# Altium PCB Doggy.PcbDoc
Units mil, origin at the board's own origin, x right, y up, seen from the top; angles counter-clockwise.
Board outline 1960.63 x 1960.63 mil, 2 copper layers (Top Layer, Bottom Layer); 53 components, 42 nets, 177 pads, 41 vias.
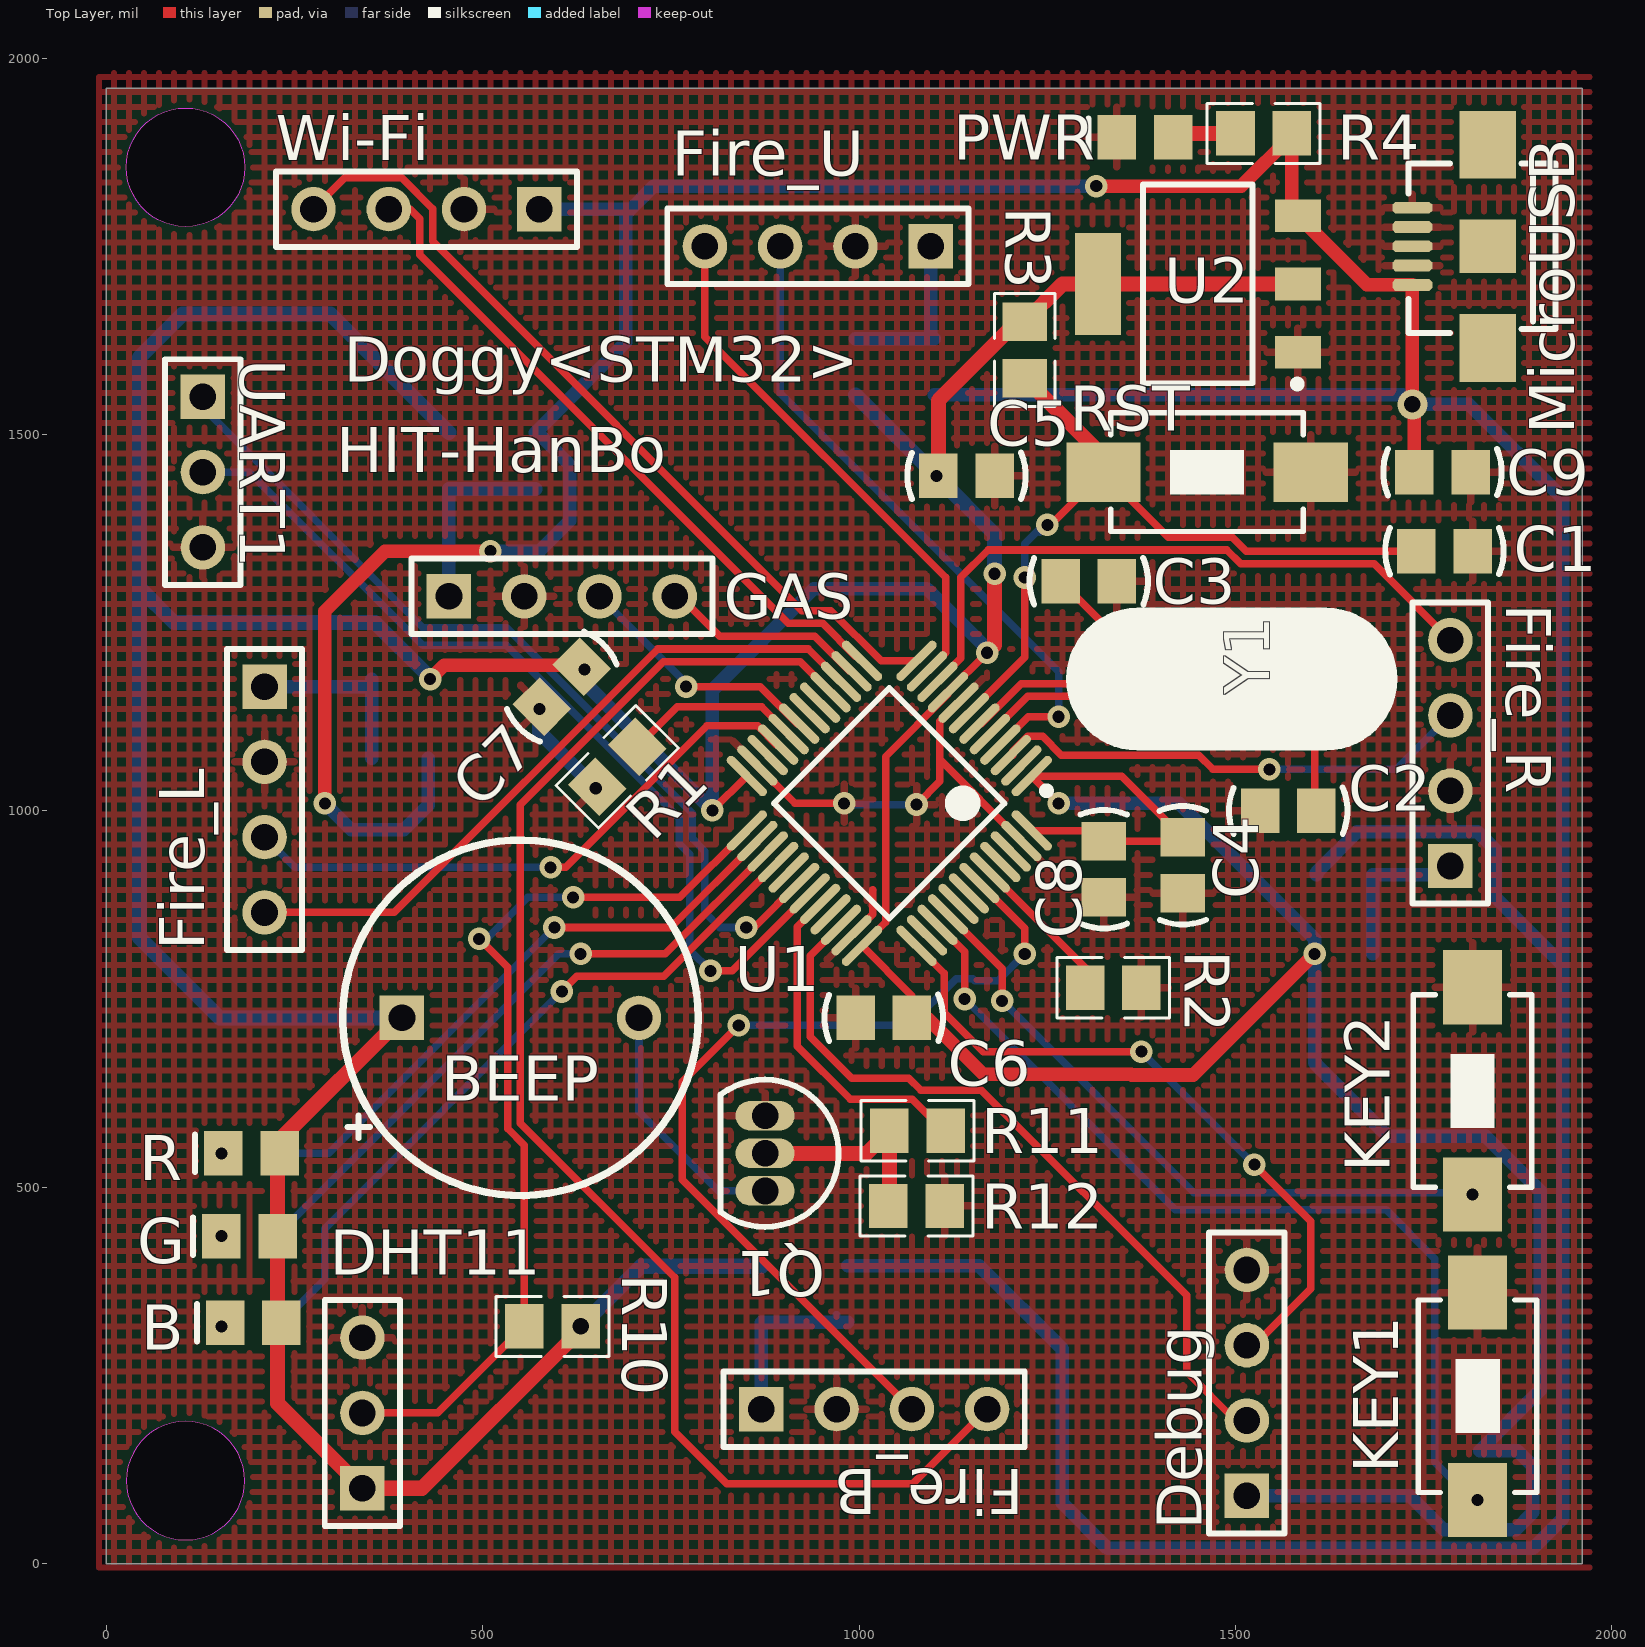
[diagram p0: Top Layer view]
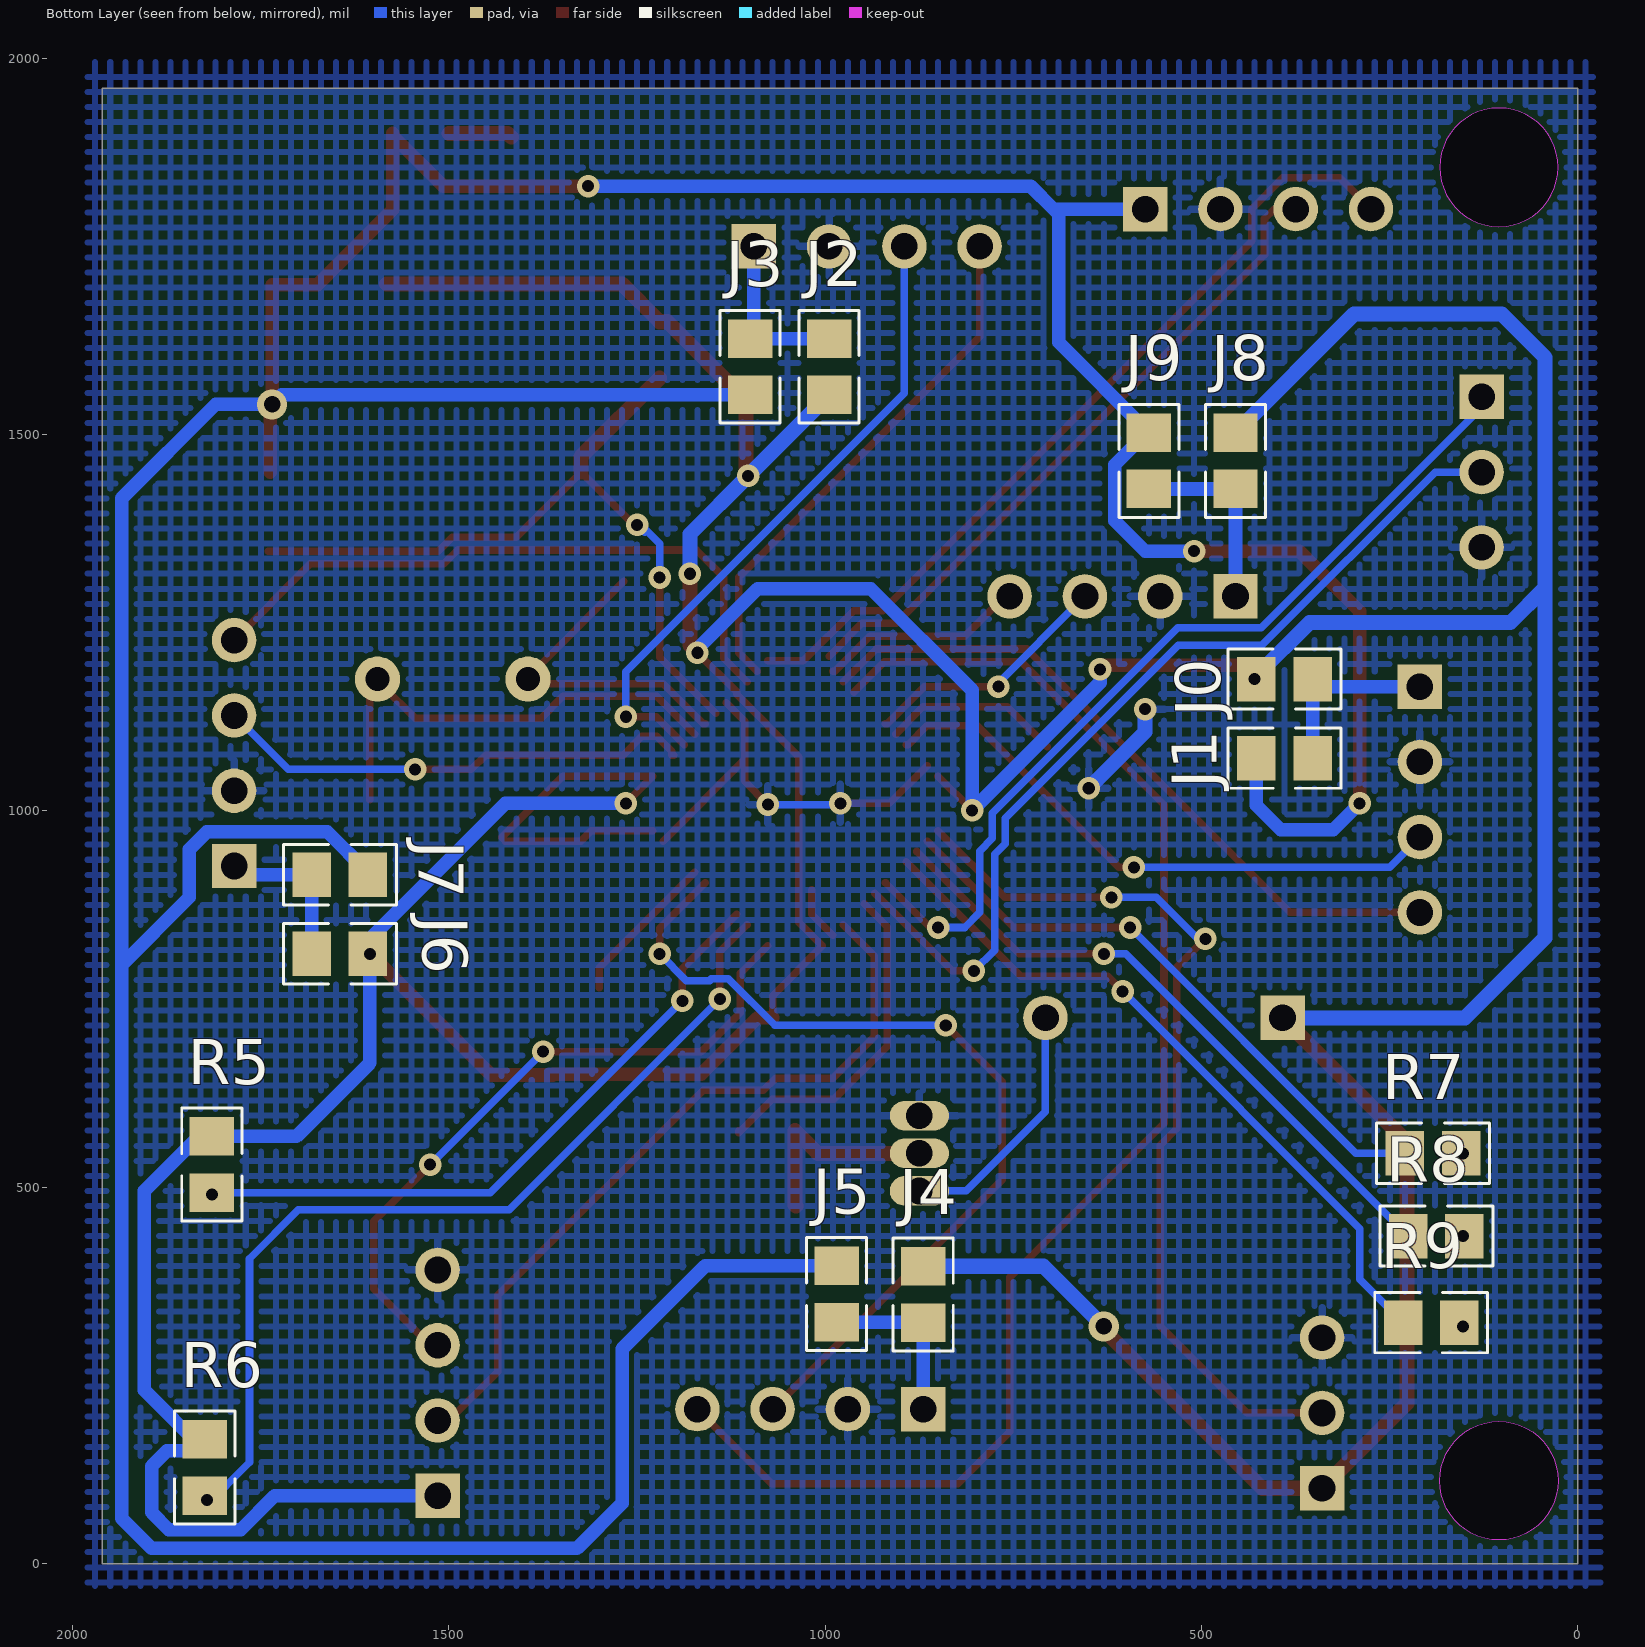
[diagram p1: Bottom Layer view, seen from below]

## Layer stack, top to bottom
Top Solder: solder mask 0.4, Solder Resist, Dk 3.5
Top Layer: signal copper 1.4
Dielectric 1: dielectric 12.6, FR-4, Dk 4.8
Bottom Layer: signal copper 1.4
Bottom Solder: solder mask 0.4, Solder Resist, Dk 3.5

## Board outline
0,-0.63 1960.63,-0.63 1960.63,1960 0,1960
cut-out: 105,1776.26 cw(c105,1855) 26.26,1855 cw(c105,1855) 105,1933.74 cw(c105,1855) 183.74,1855 cw(c105,1855)
cut-out: 26.26,110 ccw(c105,110) 105,31.26 ccw(c105,110) 183.74,110 ccw(c105,110) 105,188.74 ccw(c105,110)

## Design rules (kind name [scope] priority, off if disabled: settings)
Clearance [All] p1: gap=7
PolygonConnect [All] p1: connectstyle=Relief reliefconductorwidth=10 reliefentries=4 polygonreliefangle="90 Angle" airgapwidth=10
RoutingVias [All] p1: holewidth=16 width=30 viastyle="Through Hole" minholewidth=16 minwidth=30 maxholewidth=28 maxwidth=50
SolderMaskExpansion [All] p1: expansion=4
Width [All] p1: maxlimit=50 minlimit=7 preferedwidth=15
30 further rules are at their usual default settings.

## Components (designator, comment, footprint, x,y, rotation, side; value= is the part's Value field where it differs from the comment)
B "LED0" LED_0805 195,320 r180 top
BEEP "BEEP" Beep 550,725 r0 top
C1 "Cap" C-RAD-0805 1777.6,1345 r180 top
C2 "Cap" C-RAD-0805 1570,1000 r0 top
C3 "Cap" C-RAD-0805 1305,1305 r180 top
C4 "Cap" C-RAD-0805 1430,927.6 r90 top
C5 "Cap" C-RAD-0805 1142.6,1445 r180 top
C6 "Cap" C-RAD-0805 1032.6,725 r0 top
C7 "Cap" C-RAD-0805 605,1165 r45 top
C8 "Cap" C-RAD-0805 1325,922.49 r90 top
C9 "Cap" C-RAD-0805 1775,1450 r180 top
Debug "Header 4" HDR1X4 1515,90 r90 top
DHT11 "Header 3" HDR1X3 340,100 r90 top
Fire_B "Header 4" HDR1X4 870,205 r0 top
Fire_L "Header 4" HDR1X4 210,1165 r270 top
Fire_R "Header 4" HDR1X4 1785.36,926.7 r90 top
Fire_U "Header 4" HDR1X4 1095,1750 r180 top
G "LED0" LED_0805 190,435 r180 top
GAS "Header 4" HDR1X4 455,1285 r0 top
J0 "Res1" 0805-1 390,1175 r0 bottom
J1 "Res1" 0805-1 390,1070 r0 bottom
J2 "Res1" 0805-1 995,1590 r270 bottom
J3 "Res1" 0805-1 1100,1590 r270 bottom
J4 "Res1" 0805-1 870,357.56 r90 bottom
J5 "Res1" 0805-1 985,357.91 r90 bottom
J6 "Res1" 0805-1 1645,810 r180 bottom
J7 "Res1" 0805-1 1645,915 r180 bottom
J8 "Res1" 0805-1 455,1465 r90 bottom
J9 "Res1" 0805-1 570,1465 r90 bottom
KEY1 "SW-PB" SW_PB2_A1 1821.52,220 r0 top
KEY2 "SW-PB" SW_PB2_A1 1815,630 r180 top
MicroUSB "USB_M" USB_MICRO 1835,1750 r90 top
PWR "LED0" LED_0805 1379.8,1895 r180 top
Q1 "S8050" TO-92A 875,545 r180 top
R "LED0" LED_0805 192.6,545 r180 top
R1 "Res1" 0805-1 678.55,1058.55 r225 top
R2 "Res1" 0805-1 1337.6,765 r0 top
R3 "Res1" 0805-1 1220,1612.4 r90 top
R4 "Res1" 0805-1 1537.4,1900 r180 top
R5 "Res1" 0805-1 1815,530 r270 bottom
R6 "Res1" 0805-1 1824.42,127.6 r270 bottom
R7 "Res1" 0805-1 192.6,545 r180 bottom
R8 "Res1" 0805-1 188.19,435 r180 bottom
R9 "Res1" 0805-1 195,320 r180 bottom
R10 "Res1" 0805-1 592.6,315 r0 top
R11 "Res1" 0805-1 1077.4,575 r180 top
R12 "Res1" 0805-1 1076.19,475 r180 top
RST "SW-PB" SW_PB2_A1 1460,1450 r270 top
U1 "STM32F103C8T6" STM-LQFP48_N 1040,1010 r225 top
U2 "AMS1117-3.3" SOT-223 1450,1700 r90 top
UART1 "Header 3" HDR1X3 127.97,1550 r270 top
Wi-Fi "Header 4" HDR1X4 575,1799.32 r180 top
Y1 "XTAL" X-HC49U 1495,1175 r0 top

## Footprints (in the part's own frame and the unit in brackets; to place one, negate y for a bottom-side part, rotate by r counter-clockwise, add the part's x,y. Pads: shape width x height; smd on the part's side, far side on the other; paste and mask are expansions set on the pad)
0805-1 [mm] "贴片带丝印"
  rect 1.3x1.5 smd: 1(-0.95,0) 2(0.95,0)
  silkscreen extent -1.91,-1.02 1.91,1.02, body extent -1.14,-0.51 1.14,0.51, height 1
Beep [mm] "蜂鸣器"
  rect 1.5x1.5 hole 0.9: 1(-4,0)
  round 1.5 hole 0.9: 2(4,0)
  silkscreen extent -6,-6 6,6
C-RAD-0805 [mm] "贴片电容"
  rect 1.3x1.5 smd: 1(-0.95,0) 2(0.95,0)
  silkscreen extent -2,-0.79 2,0.79, body extent -1.27,-0.64 1.27,0.64, height 0.9
HDR1X3 [mm] "Connector; Header; 3 Position"
  rect 1.5x1.5 hole 0.9: 1(0,0)
  round 1.5 hole 0.9: 2(2.54,0) 3(5.08,0)
  silkscreen extent -1.27,-1.27 6.35,1.27
HDR1X4 [mm] "Connector; Header; 4 Position"
  rect 1.5x1.5 hole 0.9: 1(0,0)
  round 1.5 hole 0.9: 2(2.54,0) 3(5.08,0) 4(7.62,0)
  silkscreen extent -1.27,-1.27 8.89,1.27
LED_0805 [mm] "贴片二极管"
  rect 1.3x1.5 smd: 1(-0.95,0) 2(0.95,0)
  silkscreen extent 1.91,-0.63 1.91,0.64
SOT-223 [mm]
  rect 1.1x1.55 smd: 1(-2.3,-3.375) 2(0,-3.375) 3(2.3,-3.375)
  rect 3.45x1.55 smd: 4(0,3.375)
  silkscreen extent -3.5,-3.48 3.35,1.85, body extent -3.3,-3.94 3.3,3.43, height 0.8
STM-LQFP48_N [mm] "QFP, 48-Leads, Body 7x7mm, Pitch 0.5mm, IPC Medium Density"
  oval 1.8x0.3 smd: 1(-4.05,2.75) 2(-4.05,2.25) 3(-4.05,1.75) 4(-4.05,1.25) 5(-4.05,0.75) 6(-4.05,0.25) 7(-4.05,-0.25) 8(-4.05,-0.75) 9(-4.05,-1.25) 10(-4.05,-1.75) 11(-4.05,-2.25) 12(-4.05,-2.75) 25(4.05,-2.75) 26(4.05,-2.25) 27(4.05,-1.75) 28(4.05,-1.25) 29(4.05,-0.75) 30(4.05,-0.25) 31(4.05,0.25) 32(4.05,0.75) 33(4.05,1.25) 34(4.05,1.75) 35(4.05,2.25) 36(4.05,2.75)
  oval 0.3x1.8 smd: 13(-2.75,-4.05) 14(-2.25,-4.05) 15(-1.75,-4.05) 16(-1.25,-4.05) 17(-0.75,-4.05) 18(-0.25,-4.05) 19(0.25,-4.05) 20(0.75,-4.05) 21(1.25,-4.05) 22(1.75,-4.05) 23(2.25,-4.05) 24(2.75,-4.05) 37(2.75,4.05) 38(2.25,4.05) 39(1.75,4.05) 40(1.25,4.05) 41(0.75,4.05) 42(0.25,4.05) 43(-0.25,4.05) 44(-0.75,4.05) 45(-1.25,4.05) 46(-1.75,4.05) 47(-2.25,4.05) 48(-2.75,4.05)
  silkscreen extent -4.17,-2.75 2.75,3.57, body extent -3.5,-3.5 3.5,3.5, height 1.6
SW_PB2_A1 [mm]
  rect 2x2.5 smd: 1(0,3.556) 2(0,-3.444)
  silkscreen extent -2,-3.19 2,3.31, body extent -2.03,-3.17 2.03,3.3, height 1.2
TO-92A [mm]
  oval 2x1 hole 0.9: 1(0,-1.27) 2(0,0) 3(0,1.27)
  silkscreen extent -2.48,-2.48 1.5,2.48
USB_MICRO [mm] "USB方孔"
  oct 0.4x1.35 smd: 1(-1.3,2.54) 2(-0.65,2.54) 3(0,2.54) 4(0.65,2.54) 5(1.3,2.54)
  rect 2.286x1.9 smd: 6(3.429,0) 7(-3.429,0)
  rect 1.8x1.9 smd: 8(0,0)
  silkscreen extent -2.92,-2.29 2.79,2.67
X-HC49U [mil] "插件晶振"
  round 60 hole 32: 1(-100,0) 2(100,0)
  silkscreen extent -215,-90 215,90

## Part data
B G PWR R: "发光二极管"
BEEP: "蜂鸣器"
C1 C2 C3 C4 C5 C6 C7 C8 C9: "无极性电容"
Debug Fire_B Fire_L Fire_R Fire_U GAS Wi-Fi: "Header, 4-Pin"
DHT11 UART1: "Header, 3-Pin"
J0 J1 J2 J3 J4 J5 J6 J7 J8 J9 R1 R2 R3 R4 R5 R6 R7 R8 R9 R10 R11 R12: "贴片电阻"
KEY1 KEY2 RST: "微动开关"
MicroUSB: "MicroUSB接口"
Q1: "NPN三极管"
U1: "ARM Cortex-M3 32-bit MCU, 64 KB Flash, 20 KB Internal RAM, 37 I/Os, 48-pin LQFP, -40 to 85 degC, Tray"
U2: library part ASM1117, "3.3V稳压芯片"
Y1: "Crystal Oscillator"

## Via types
v1: diameter 30, hole 16, Top Layer to Bottom Layer, 39 vias
v2: diameter 40, hole 22, Top Layer to Bottom Layer, 2 vias

## Nets (pads, with @x,y where several pads share a name; then routed paths per layer and width w, separated by ;. In a path a pad name is that pad's centre, name@x,y a point inside that pad or via, vN(x,y) a via of type N, cw(c..) or ccw(c..) an arc to the next point about the centre after c; other vN are vias at no path point)
3V3: B.1 BEEP.1 C4.2 C5.2 C6.2 C7.2 C8.2 Debug.1 DHT11.1 G.1 J0.2 J2.2 J4.2 J6.2 J8.2 R3.2 R5.1 R6.1 R10.2 R.1 U1.1 U1.9 U1.24 U1.36 U1.48 U2.2 U2.4 | length 9323.1
  Top Layer w10: v1(805,1000.49) U1.24 ; C6.2 1070,754.51 U1.36 1035,851.89 1035,1072.08 1117.95,1155.03 U1.9 1117.95,1157.95 v1(1170,1210) ; U1.48 1311.08,973.81 C8.2 1424.89,959.89 C4.2 1348.81,1046.19 U1.1 1229.3,1045.7 v1(1265,1010)
  Top Layer w18: v1(430,1175) 448.53,1193.53 635,1193.53 v1(635,1187.89) C7.2 ; C6.2 1090,725 1165,650 1361.16,650 1362.16,649 1444,649 v1(1605,810)
  Top Layer w20: BEEP.1 230,562.48 R.1 227.4,542.4 G.1 227.4,212.6 DHT11.1 419.36,100 630,310.64 v2(630,315) ; v1(1102.6,1445) C5.2 1105.2,1545.2 1209.8,1649.8 R3.2 1270.2,1700 U2.4 U2.2 ; v1(1170,1210) 1180,1220 v1(1180,1315)
  Bottom Layer w18: J0.2 v1(430,1175) ; v1(635,1187.89) 635,1170.49 v1(805,1000.49) 805,1160.49 939.51,1295 1090,1295 1175,1210 v1(1170,1210) ; v1(1265,1010) 1425,1010 1605,830 v1(1605,810) 1605,665 1702.6,567.4 R5.1 1832.6,567.4 1905,495 1905,230.39 1824.42,149.8 1874.61,149.8 1895,129.42 1895,67.84 1872.16,45 1776.67,45 1731.67,90 Debug.1
  Bottom Layer w20: BEEP.1 150.13,725 43.84,831.29 43.84,1296.16 ; J0.2 427.4,1179.36 356.76,1250 90,1250 43.84,1296.16 ; J8.2 297.4,1660 101.25,1660 43.84,1602.58 43.84,1296.16 ; v2(630,315) 709.96,394.96 J4.2 ; J2.2 v1(1102.6,1445) 1180,1367.6 v1(1180,1315)
5V0: C9.2 J1.2 J3.2 J5.2 J7.2 J9.2 MicroUSB.1 R4.1 U2.3 Wi-Fi.1 | length 6891
  Top Layer w18: v1(290,1010) 290,1265 370,1345 v1(510,1345) ; v1(1315,1830) 1507.75,1830 R4.1@1574.8,1897.06 ; R4.1 R4.1@1574.8,1897.06 ; C9.2 1737.6,1537.4 v2(1735,1540) MicroUSB.1 1674.61,1698.82 U2.3 1574.8,1798.62 R4.1@1574.8,1897.06
  Bottom Layer w18: v1(290,1010) 325,975 395,975 427.4,1007.4 J1.2 ; v1(510,1345) 575,1345 615.53,1385.53 615.53,1459.82 572.94,1502.4 J9.2 690,1622.4 690,1792.76 696.57,1799.32 ; Wi-Fi.1 696.57,1799.32 ; J5.2 1159.68,395.32 1270,285 1270,80 1330,20 1895,20 1935,60 1935,795 ; J3.2 1722.4,1552.6 v2(1735,1540) 1810,1540 1935,1415 1935,795 ; v1(1315,1830) 727.24,1830 696.57,1799.32 ; J7.2 1607.6,917.94 1661.89,972.23 1821.52,972.23 1845,948.75 1845,885 1935,795
BEEP: R11.1 U1.32 | length 449.1
  Top Layer w10: U1.32 917.78,846.02 917.78,687.22 988.47,616.53 1070.56,616.53 1114.8,572.29 R11.1
DHT_DATA: DHT11.2 R10.1 U1.25 | length 1218
  Top Layer w10: DHT11.2 440.2,200 R10.1 555.2,555.76 533,577.96 533,792 v1(495,830) ; v1(620,885) 761.89,885 U1.25
  Bottom Layer w10: v1(495,830) 505,830 560,885 v1(620,885)
Fire_B: Fire_B.4 U1.16 | length 1910.1
  Top Layer w10: U1.16 921.6,1198 739.64,1198 550,1008.36 550,585 755,380 755,175 823.88,106.12 1071.12,106.12 Fire_B.4
Fire_B_D: Fire_B.3 U1.43 | length 1208
  Top Layer w10: v1(840,715) 765,640 765,510 Fire_B.3 ; U1.43 1220,843.92 v1(1220,810)
  Bottom Layer w10: v1(840,715) 1066.82,715 1128.82,777 1151.18,777 1153.73,774.45 1184.45,774.45 v1(1220,810)
Fire_L: Fire_L.4 U1.15 | length 929
  Top Layer w10: Fire_L.4 382.6,865 732.6,1215 932.44,1215 U1.15
Fire_L_D: Fire_L.3 U1.21 | length 787.1
  Top Layer w10: v1(590,925) 610,925 797.81,1112.81 865.07,1112.81 889.94,1087.95 U1.21
  Bottom Layer w10: Fire_L.3 250,925 v1(590,925)
Fire_R: Fire_R.4 U1.10 | length 866.7
  Top Layer w10: U1.10 1135,1202.44 1135,1310.32 1171.21,1346.53 1488.47,1346.53 1507,1328 1684.07,1328 Fire_R.4
Fire_R_D: Fire_R.3 U1.3 | length 645
  Top Layer w10: U1.3 1203.98,1074.03 1203.98,1079.06 1223.81,1098.89 1243.68,1098.89 1268.55,1074.03 1451.08,1074.03 1470.11,1055 v1(1545,1055)
  Bottom Layer w10: v1(1545,1055) 1713.66,1055 Fire_R.3
Fire_U: Fire_U.4 U1.11 | length 707.5
  Top Layer w10: Fire_U.4 795,1630 1115,1310 1115,1210.27 U1.11
Fire_U_D: Fire_U.3 U1.4 | length 871.1
  Top Layer w10: U1.4 1224.6,1125 v1(1265,1125)
  Bottom Layer w10: Fire_U.3 895,1555 1265,1185 v1(1265,1125)
GAS_A: GAS.4 U1.14 | length 276.2
  Top Layer w10: GAS.4 761.7,1285 814.7,1232 940.76,1232 987.37,1185.38 U1.14
GAS_D: GAS.3 U1.19 | length 345.4
  Top Layer w10: v1(770,1165) 868.56,1165 917.78,1115.79 U1.19
  Bottom Layer w10: GAS.3 775,1165 v1(770,1165)
GND: C1.1 C2.1 C3.1 C4.1 C5.1 C6.1 C7.1 C8.1 C9.1 Debug.4 DHT11.3 Fire_B.2 Fire_L.2 Fire_R.2 Fire_U.2 GAS.2 KEY1.1 KEY2.2 MicroUSB.2 MicroUSB.3 MicroUSB.4 MicroUSB.5 PWR.2 Q1.1 R1.2 R2.2 R12.1 RST.1 U1.8 U1.23 U1.35 U1.47 U2.1 UART1.3 Wi-Fi.2 | length 755.7
  Top Layer w10: v1(650,1030) R1.2 ; U1.23 914.73,1010 v1(980,1010) ; U1.35 1018,862.73 1018,895 ; v1(1076.19,1008.36) 1107,1039.17 1107,1068.27 ; U1.8 1107,1118.76 1107,1068.27 ; U1.47 1107,1068.27
  Bottom Layer w10: v1(980,1010) 981.64,1008.36 v1(1076.19,1008.36)
  Bottom Layer w20: v1(575,1135) 575,1105 v1(650,1030)
K1: KEY1.2 R6.2 U1.39 | length 1235.9
  Top Layer w10: U1.39 1140,812.56 v1(1140,750)
  Bottom Layer w10: v1(1140,750) 1420,470 1700,470 1765,405 1765,134.42 R6.2@1824.42,75
  other v1: 1821.52,84.41
K2: KEY2.1 R5.2 U1.40 | length 875.4
  Top Layer w10: U1.40 1190,790.4 v1(1190,747.45)
  Bottom Layer w10: v1(1190,747.45) 1444.86,492.6 R5.2
  other v1: 1815,490
LD1: R7.1 U1.26 | length 806.5
  Top Layer w10: v1(595,845) 749.73,845 U1.26
  Bottom Layer w10: R7.1 295,545 v1(595,845)
LD2: R8.1 U1.27 | length 864.6
  Top Layer w10: v1(630,810) 742.56,810 U1.27
  Bottom Layer w10: R8.1 600.59,810 v1(630,810)
LD3: R9.1 U1.28 | length 953.1
  Top Layer w10: v1(605,760) 625,780 740.4,780 U1.28
  Bottom Layer w10: R9.1 290,377.6 290,445 v1(605,760)
NetB_2: B.2 R9.2
  other v1: 152.6,315
NetBEEP_2: BEEP.2 Q1.3 | length 335.9
  Bottom Layer w10: BEEP.2 707.48,600.12 812.6,495 Q1.3
NetC1_2: C1.2 R3.1 RST.2 U1.7 | length 1057.7
  Top Layer w10: U1.7 1220,1203.92 v1(1220,1310) v1@1220,1320 ; v1(1250,1380) 1250,1375.59 RST.2 1410.88,1363.53 1495.51,1363.53 1514.04,1345 C1.2
  Top Layer w20: R3.1 1324.41,1470.59 RST.2
  Bottom Layer w10: v1(1220,1310) 1220,1355 1245,1380 v1(1250,1380) v1@1240,1370
NetC2_2: C2.2 U1.5 Y1.2 | length 625.7
  Top Layer w10: U1.5 1223.76,1152 1348.6,1152 1377.6,1123 1545,1123 1587,1165 1595,1165 1605,1155 C2.2@1605,1015
NetC3_2: C3.2 U1.6 Y1.1 | length 441.8
  Top Layer w10: U1.6 1162.22,1115.79 1215.44,1169 1391,1169 Y1.1@1395,1165 ; C3.2 1395,1177.6 Y1.1
NetFire_B_1: Fire_B.1 J4.1 J5.1 | length 230.8
  Bottom Layer w10: J4.1 J4.1@870.35,320.51 ; J5.1@969.65,330.16 J5.1@970,330.51
  Bottom Layer w18: Fire_B.1 J4.1 ; J4.1@870.35,320.51 J5.1
NetFire_L_1: Fire_L.1 J0.1 J1.1 | length 251.7
  Bottom Layer w10: J0.1@342.6,1165 J0.1
  Bottom Layer w18: Fire_L.1 J0.1@342.6,1165 ; J1.1 J0.1
NetFire_R_1: Fire_R.1 J6.1 J7.1 | length 212.8
  Bottom Layer w18: J6.1 J7.1 1773.66,915 Fire_R.1
NetFire_U_1: Fire_U.1 J2.1 J3.1 | length 229.7
  Bottom Layer w10: J3.1@1095,1632.4 J3.1
  Bottom Layer w18: J2.1 J3.1 ; J3.1@1095,1632.4 Fire_U.1
NetG_2: G.2 R8.2
  other v1: 152.6,435
NetGAS_1: GAS.1 J8.1 J9.1 | length 257.6
  Bottom Layer w18: GAS.1 J8.1 J9.1
NetPWR_1: PWR.1 R4.2 | length 84.9
  Top Layer w20: PWR.1 1422.21,1900 R4.2
NetQ1_2: Q1.2 R11.2 R12.2 | length 277.9
  Top Layer w20: Q1.2 1010,545 R11.2 1040,476.21 R12.2
NetR1_1: R1.1 U1.20 | length 238.6
  Top Layer w10: R1.1 758.41,1138.41 758.82,1138 870.24,1138 U1.20
NetR2_1: R2.1 U1.44 | length 205.6
  Top Layer w10: U1.44 1300.2,791.56 R2.1
NetR7_2: R7.2 R.2
  other v1: 152.6,545
SWCLK: Debug.3 U1.37 | length 911.9
  Top Layer w10: U1.37 1113,783.89 1113,731.7 1164.7,680 v1(1375,680) ; Debug.3 1525,290 1600,365 1600,455 v1(1525,530)
  Bottom Layer w10: v1(1375,680) v1(1525,530)
SWDIO: Debug.2 U1.34 | length 1016
  Top Layer w10: U1.34 935,807.56 935,700 990,645 1066.13,645 1082.13,629 1162.21,629 1435,356.21 1435,255 1500,190 Debug.2
UART1_RX: U1.31 UART1.2 | length 1217.5
  Top Layer w10: v1(802.5,787.5) 831.42,787.5 U1.31
  Bottom Layer w10: UART1.2 189.93,1450 419.93,1220 530.96,1220 761,989.96 761,956.49 775,942.49 775,815 v1(802.5,787.5)
UART1_TX: U1.30 UART1.1 | length 1184.4
  Top Layer w10: v1(850,845) 860.79,845 920,904.21 U1.30
  Bottom Layer w10: UART1.1 127.97,1536.01 420.5,1243.47 531.53,1243.47 778,997 778,963.54 795,946.54 795,865 815,845 v1(850,845)
UART2_RX: U1.13 Wi-Fi.3 | length 894.1
  Top Layer w10: Wi-Fi.3 403.79,1799.32 416.47,1786.64 416.47,1738.53 906,1249 951.6,1249 U1.13@995,1205.6
UART2_TX: U1.12 Wi-Fi.4 | length 1109.3
  Top Layer w10: Wi-Fi.4 316.53,1840.85 392.2,1840.85 433.47,1799.58 433.47,1756.53 924,1266 962.44,1266 1029.13,1199.3 U1.12
pads on no net: MicroUSB.6 MicroUSB.7 MicroUSB.8 U1.2 U1.17 U1.18 U1.22 U1.29 U1.33 U1.38 U1.41 U1.42 U1.45 U1.46

## Polygon pours and split planes (outlines as drawn)
GND on Top Layer "Top Layer-GND" (hatched 90Degree grid 20 track 8, pour order 12): -10,1975 -5,1980 1970,1980 1970,-15 1965,-20 1950,-5 -10,-5
GND on Bottom Layer "Bottom Layer-GND" (hatched 90Degree grid 20 track 8, pour order 14): -20,1995 1980,1995 1980,-25 1985,-30 -30,-30

## Silkscreen, mask and mechanical layers (free items; w line width, h text height)
Top Overlay:
  text "Doggy<STM32>" at 315,1570 h60
  text "HIT-HanBo" at 305,1450 h60
Bottom Overlay:
Mechanical 1:
  circle w10: c105,1855 r78.74
  circle w10: c105,105 r78.74
  circle w10: c105,110 r78.74
  circle w10: c105,1855 r78.74